# Altium PCB opamp.PcbDoc
Units mil, origin at the board's own origin, x right, y up, seen from the top; angles counter-clockwise.
Board outline 3000 x 2300 mil, 2 copper layers (Top Layer, Bottom Layer); 13 components, 7 nets, 36 pads, 0 vias.
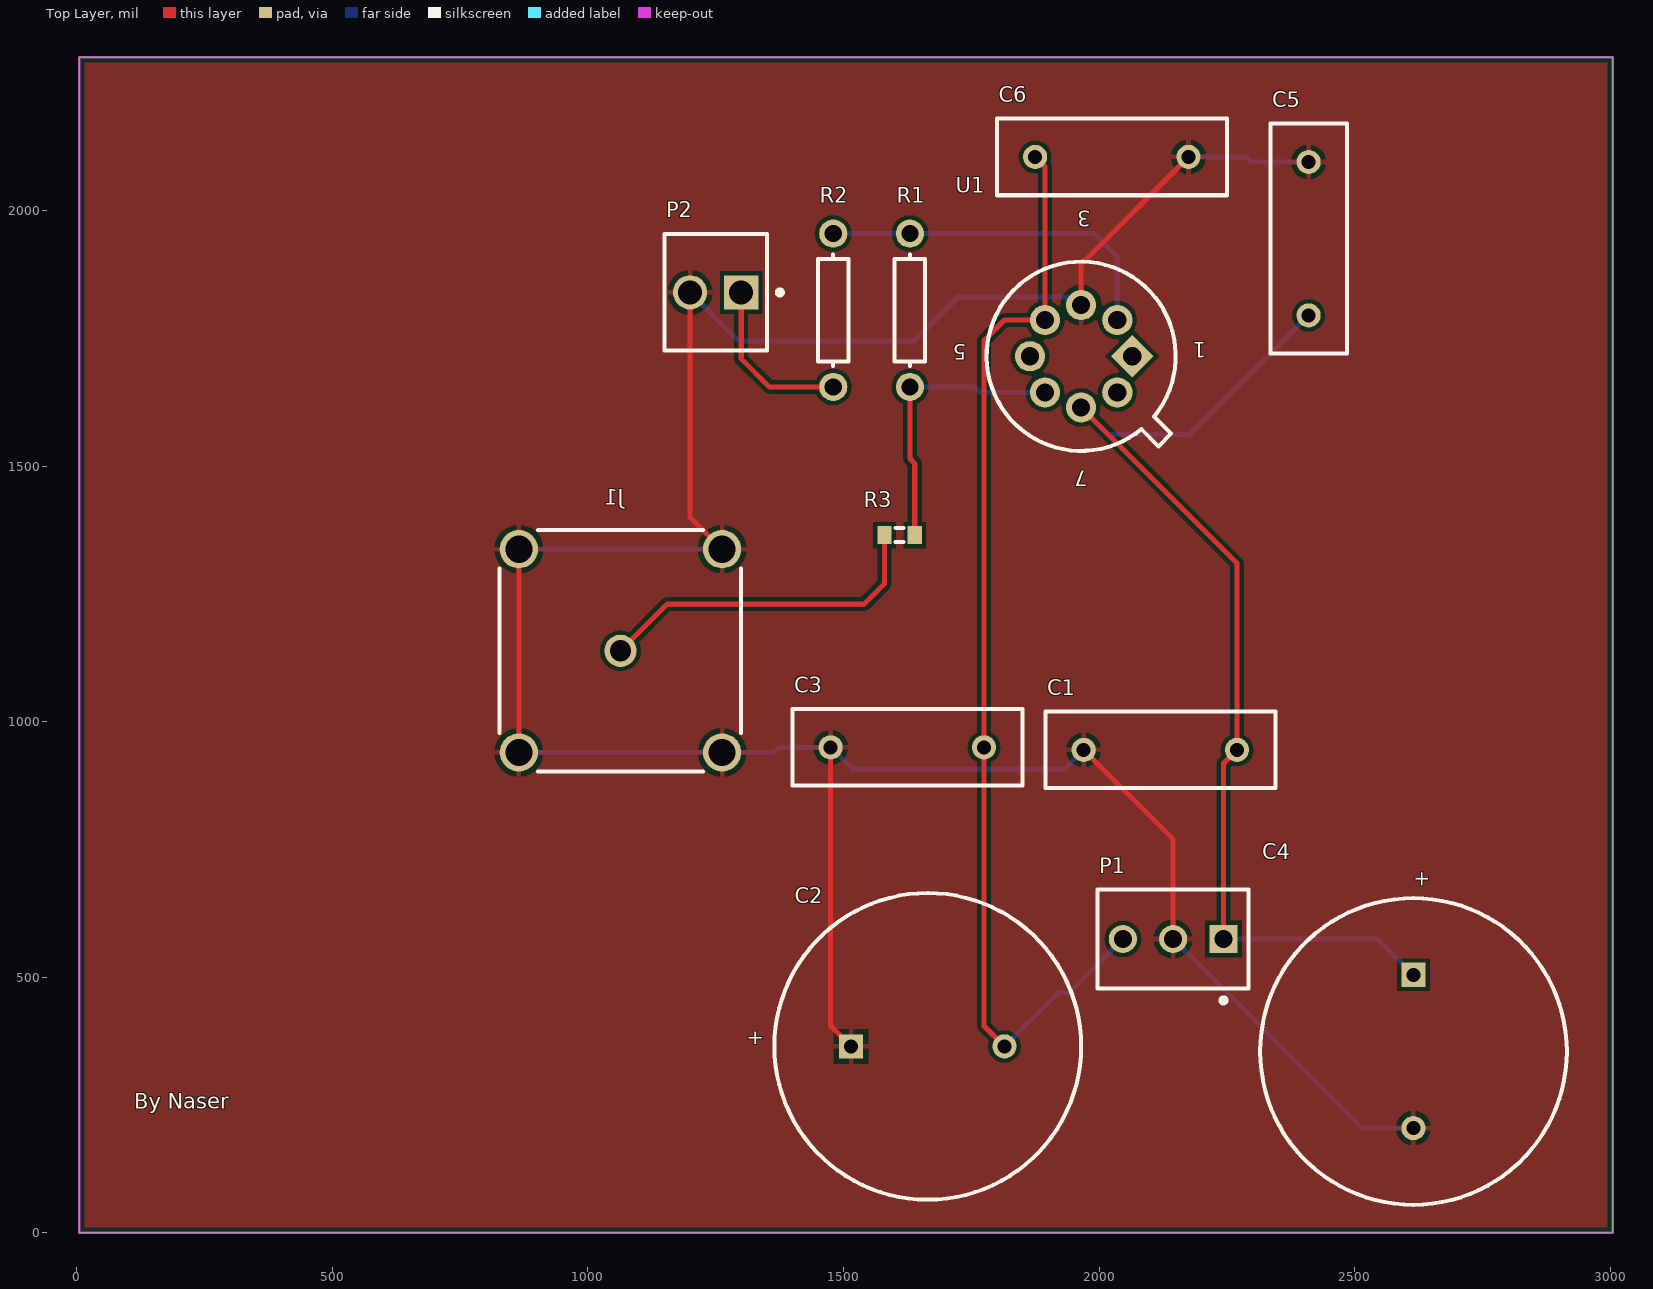
[diagram p0: Top Layer view]
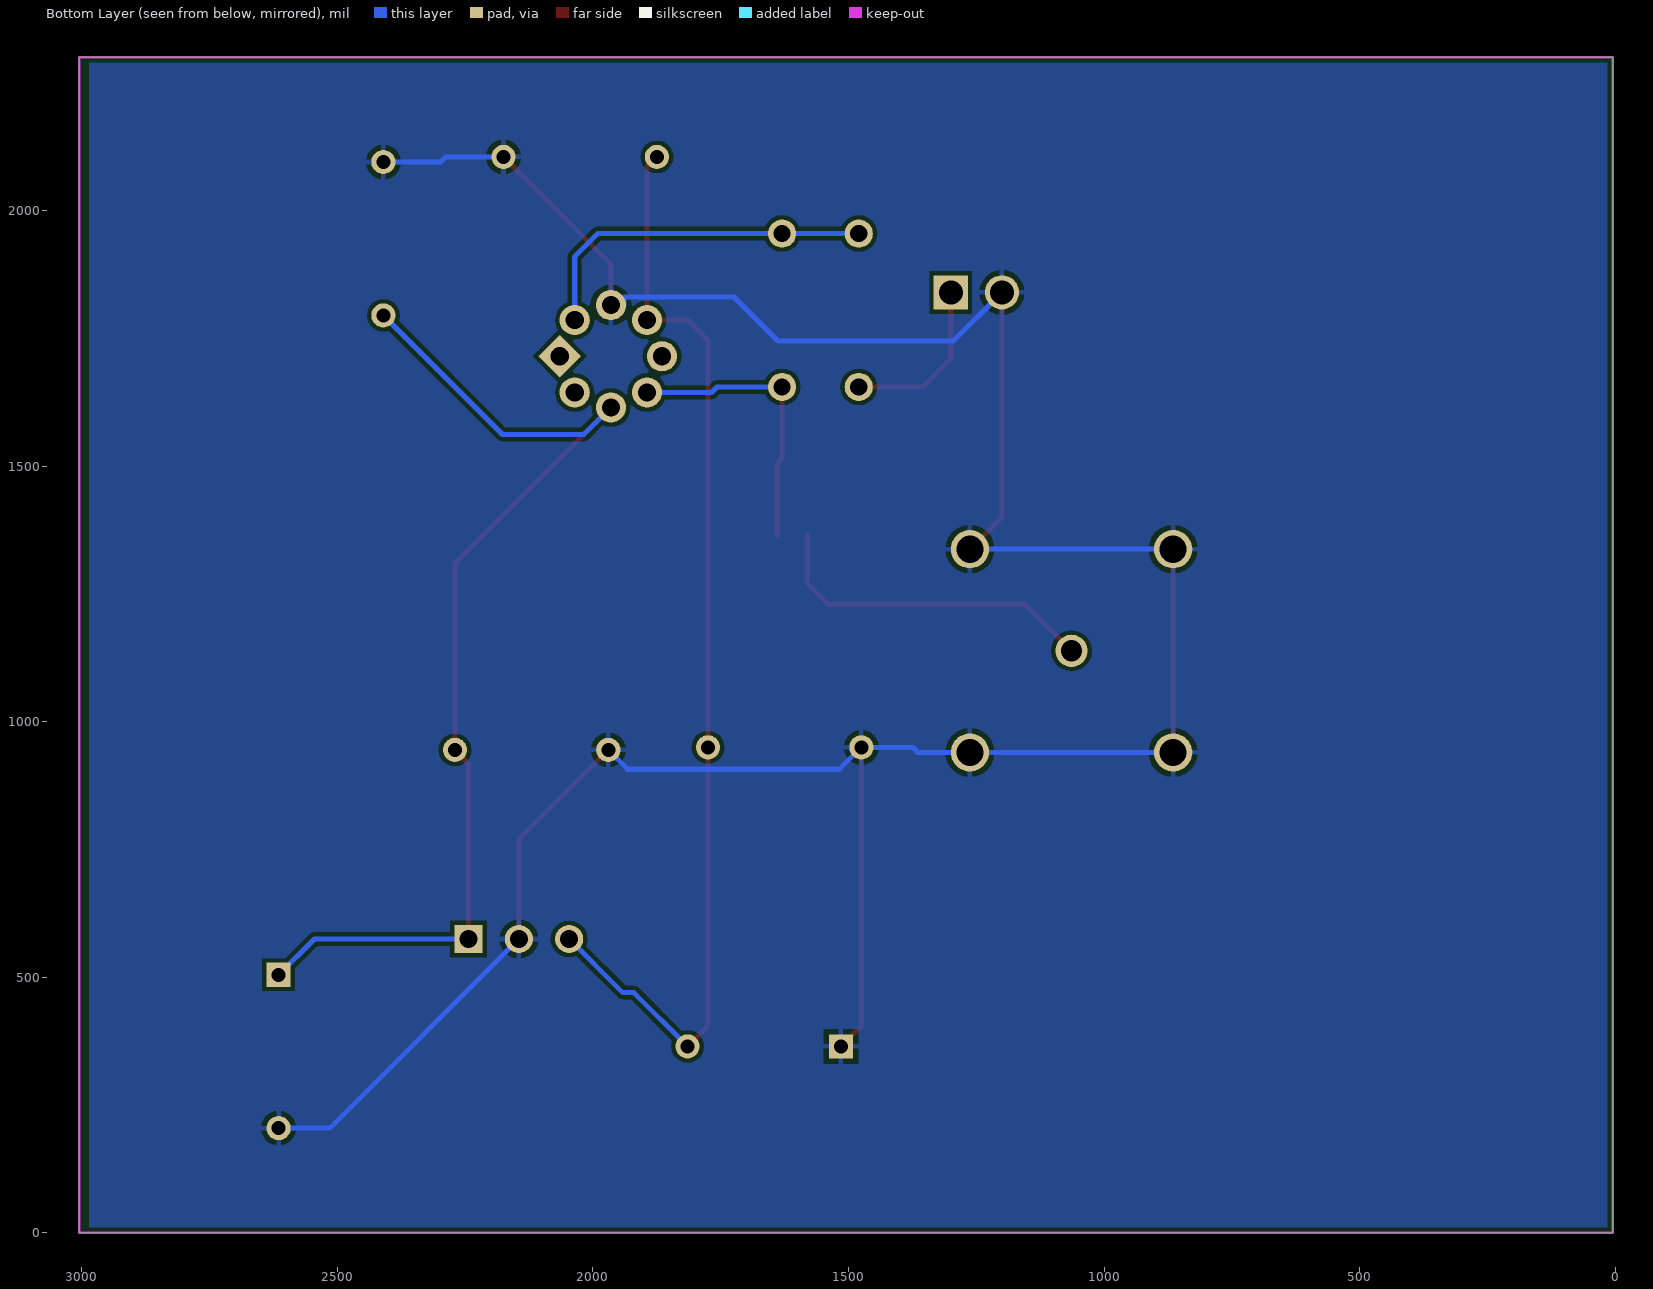
[diagram p1: Bottom Layer view, seen from below]

## Layer stack, top to bottom
Top Solder: solder mask 0.4, Solder Resist, Dk 3.5
Top Layer: signal copper 1.4
Dielectric 1: dielectric 12.6, FR-4, Dk 4.8
Bottom Layer: signal copper 1.4
Bottom Solder: solder mask 0.4, Solder Resist, Dk 3.5

## Board outline
5,0 3005,0 3005,2300 5,2300

## Design rules (kind name [scope] priority, off if disabled: settings)
Clearance [All] p1: gap=8 ignorepadtopadclearanceinfootprint=FALSE
MinimumSolderMaskSliver [All] p1: minsoldermaskwidth=1
PolygonConnect [All] p1: connectstyle=Relief reliefconductorwidth=10 reliefentries=4 polygonreliefangle="90 Angle" airgapwidth=10
RoutingVias [All] p1: holewidth=28 width=50 viastyle="Through Hole" minholewidth=28 minwidth=50 maxholewidth=28 maxwidth=50
SilkToSilkClearance [All] p1: silktosilkclearance=1
SilkToSolderMaskClearance [IsPad] p1: minsilkscreentomaskgap=1 clearancetoexposedcopper=TRUE
SolderMaskExpansion [All] p1: expansion=4 istentingtop=FALSE
Width [All] p1: maxlimit=10 minlimit=10 preferedwidth=10
27 further rules are at their usual default settings.

## Classes and differential pairs
component class power: C1 C2 C3 C4 P1
component class opamp: C5 C6 J1 P2 R1 R2 R3

## Components (designator, comment, footprint, x,y, rotation, side; value= is the part's Value field where it differs from the comment)
C1 "Cap" RAD-0.3 2120,945 r0 top value=100nF
C2 "Cap Pol1" RB7.6-15 1665,365 r180 top value=100uF
C3 "Cap" RAD-0.3 1625,950 r0 top value=100nF
C4 "Cap Pol1" RB7.6-15 2615,355 r90 top value=100uF
C5 "Cap" RAD-0.3 2410,1945 r270 top value=100nF
C6 "Cap" RAD-0.3 2025,2105 r180 top value=100nF
J1 "51K204-400A5" ROS-51K204-400A5_V 1063.82,1138.82 r270 top
P1 "171825-3" TECO-171825-3_V 2145,575 r180 top
P2 "22-27-2021" MOLX-22-27-2021_V 1250,1840 r180 top
R1 "Res1" AXIAL-0.3 1630,1805 r270 top value=10K
R2 "Res1" AXIAL-0.3 1480,1805 r90 top value=1K
R3 "Res3" J1-0603 1610,1365 r180 top value=50
U1 "Op Amp" H-08A 1965,1715 r180 top

## Footprints (in the part's own frame and the unit in brackets; to place one, negate y for a bottom-side part, rotate by r counter-clockwise, add the part's x,y. Pads: shape width x height; smd on the part's side, far side on the other; paste and mask are expansions set on the pad)
AXIAL-0.3 [mm] "Axial Device, Thru-Hole; 2 Leads; 0.3 in Pin Spacing"
  round 1.4 hole 0.85: 1(-3.81,0) 2(3.81,0)
  silkscreen extent -2.77,-0.76 2.77,0.76
H-08A [mm] "Can; 8 Leads; Pin Circle Dia. 5.08 mm; Lead Dia. 0.53 mm (max)"
  rect 1.5x1.5 hole 0.9 rot 45: 1(-2.54,0)
  round 1.5 hole 0.9: 2(-1.796,-1.796) 3(0,-2.54) 4(1.796,-1.796) 5(2.54,0) 6(1.796,1.796) 7(0,2.54) 8(-1.796,1.796)
  silkscreen extent -4.7,-4.7 4.7,4.7
J1-0603 [mm] "Chip Resistor, Body 1.6x0.8mm, IPC High Density"
  rect 0.7x0.9 smd: 1(-0.75,0) 2(0.75,0)
  silkscreen extent -0.2,-0.35 0.2,0.35, body extent -0.85,-0.48 0.85,0.48, height 0.9
MOLX-22-27-2021_V [mm] "Header, 2-Leads, Body 5.8x5.08mm"
  rect 1.7x1.7 hole 1.19: 1(-1.27,0)
  round 1.7 hole 1.19: 2(1.27,0)
  silkscreen extent -3.32,-2.9 2.54,2.9, body extent -2.54,-2.9 2.54,2.9, height 11.72
RAD-0.3 [mm] "Radial Cap, Thru-Hole; 2 Leads; 0.3 in Pin Spacing"
  round 1.2 hole 0.7: 1(-3.81,0) 2(3.81,0)
  silkscreen extent -5.71,-1.91 5.71,1.91
RB7.6-15 [mm] "Polarized Capacitor (Radial); 2 Leads"
  rect 1.2x1.2 hole 0.7: 1(3.81,0)
  round 1.2 hole 0.7: 2(-3.81,0)
  silkscreen extent -7.62,-7.62 7.62,7.62
ROS-51K204-400A5_V [mm] "BNC 50R Right Angle Jack, 12.5x32.6x14.5mm, Rosenberger Recommended"
  round 1.6 hole 1.05: 1(0,0)
  round 1.9 hole 1.35: MH(-5.05,5.05) MH(-5.05,-5.05) MH(5.05,5.05) MH(5.05,-5.05)
  silkscreen extent -6,-6 6,6, body extent -6.25,-26.6 6.25,6, height 15.25
TECO-171825-3_V [mm] "Connector, 3-Leads, Body 4.9x7.5mm, Pitch 2.5mm"
  rect 1.4x1.4 hole 0.9: 1(-2.5,0)
  round 1.4 hole 0.9: 2(0,0) 3(2.5,0)
  silkscreen extent -3.75,-2.45 3.75,3.17, body extent -3.75,-2.4 3.75,2.5, height 10.4

## Part data
C1 C3 C5 C6: "Capacitor", LatestRevisionDate=17-Jul-2002, LatestRevisionNote="Re-released for DXP Platform.", PackageDescription="Radial Cap, Thru-Hole; 2 Leads; 0.3 in Pin Spacing", PackageReference=RAD-0.3, Published=8-Jun-2000, Publisher="Altium Limited"
C2 C4: "Polarized Capacitor (Radial)", LatestRevisionDate=17-Jul-2002, LatestRevisionNote="Re-released for DXP Platform.", PackageDescription="Polarized Capacitor (Radial); 2 Leads", PackageReference=RB7.6-15, Published=8-Jun-2000, Publisher="Altium Limited"
J1: library part CMP-0753-00004-1, "BNC 50R Right Angle Jack, Panel Feedthrough, Up to 10 GHz, -55 to 155 degC", Manufacturer=Rosenberger, ComponentLink1Description="Manufacturer URL", ComponentLink1URL=http://www.rosenberger.de, ComponentLink2Description=Datasheet, ComponentLink2URL=http://rosenberger.de/ok/images/documents/db/51K204-400A5.pdf, ComponentLink3Description="Package Specification", ComponentLink3URL=http://rosenberger.de/ok/images/documents/db/51K204-400A5.pdf, ComponentLink4Description="Series Overview / Design Note", ComponentLink4URL=http://rosenberger.de/ok/images/documents/spez/51.pdf, ComponentLink5Description="Webshop / RFQ", ComponentLink5URL=http://www.rosenberger.com/en/contact/sales/, DatasheetVersion=d00, Design Note="Footprint in library is a generic example - only application specific footprint delivers High Performance", Mounting Technology="Through Hole", PackageDescription="50R BNC Right Angle Jack, 12.5 x 32.6 x 14.5 mm", PackageReference=51K204-400A5, PackageVersion=d00, PartNumber=51K204-400A5
P1: library part CMP-2000-07494-1, "Male Header, Pitch 2.5 mm, 1 x 3 Position, Height 10.4 mm, Tail Length 3.6 mm,  / -20 to 95 degC / , RoHS, Bulk", Colour=Natural, Contact Resistance=20mOhm, Flammability Rating=UL94V-0, Manufacturer="TE Connectivity", Max Current Rating=3.5A, Max Operating Temperature=95degC, Max Voltage Rating (AC)=250V, Max Voltage Rating (DC)=350.25kV, Min Operating Temperature=-20degC, Package Description="Male Header, Pitch 2.5 mm, 1 x 3 Position, Height 10.4 mm, Tail Length 3.6 mm", Package Quantity=1000, Voltage Rating=350V, Approvals=UL, Backwall/Post Interruptions=No(Without), Connector Type=Header, Contact Gender=Male, Contact Material=Brass, Contact Mating Length=0.295inch, Contact Plating=Tin, Contact Retention=No(Without), Contact Shape=Square, Datasheet URL=http://www.te.com/commerce/DocumentDelivery/DDEController?Action=showdoc&DocId=Customer+Drawing%7F171825%7FY3%7Fpdf%7FEnglish%7FENG_CD_171825_Y3.pdf%7F171825-3, Datasheet Version="Rev. Y3, 12/2016", Depth=4.9mm, Height=0.409inch, Housing Colour=Natural, Housing Material=Nylon, Length=7.5mm, Manufacturer URL=http://www.te.com/, Mating Alignment=Yes(With), Mating Post Length=7.5mm, Mating Retention=Yes(With), Mount=ThroughHole, Mounting Technology=ThroughHole, Number Of Contacts=3, Number of Positions=3, Number Of Rows=1, Orientation=Straight, Package Reference=171825-3, Packaging=Bag, Panel Mount Retention=No(Without), PCB Mount Alignment=No(Without), PCB Mount Retention=Without, PCB Mounting Orientation=Vertical, PCB Thickness=0.063inch, Pitch=2.5mm, Plating Thickness=0.8um, REACH SVHC=NoSVHC, RoHSCompliant=True, Strain Relief=No(Without), Tail Length=0.142inch, Termination=Solder
P2: library part CMP-2000-05537-1, "Male Header, Pitch 2.54 mm, 1 x 2 Position, Height 11.7 mm, Tail Length 3.56 mm, 0 to 75 degC, RoHS, Bulk", Current - Max=4A, Manufacturer=Molex, Operating temperature=0°Cto+75°C, Package Description="2-Leads Header, Body 5.08 x 5.8 mm, Pitch 2.54 mm", Package Version="Rev. BC, 02/2012", PartNumber=0022272021, Voltage - Max=250V, Contact Material=Tinplatedbrass, Current Rating=4A, Datasheet URL=http://www.molex.com/pdm_docs/sd/022272021_sd.pdf, Datasheet Version="Rev. F, 06/2009", Housing Material=Nylon(UL94V-0), Manufacturer URL=http://www.molex.com/, Mounting Technology=ThroughHole, No. of Positions=2, No. of Rows=1, Orientation=Vertical, Package Reference=22-27-2021, Pitch=2.54mm, Voltage Rating=250V
R1 R2 R3: "Resistor", Published=8-Jun-2000, Publisher="Altium Limited"
  R1 R2: LatestRevisionDate=17-Jul-2002, LatestRevisionNote="Re-released for DXP Platform.", PackageDescription="Axial Device, Thru-Hole; 2 Leads; 0.3 in Pin Spacing", PackageReference=AXIAL-0.3
  R3: LatestRevisionDate=29-May-2009, LatestRevisionNote="IPC-7351 Footprint Added.", PackageDescription="Chip Resistor", PackageReference=J1-0603
U1: "FET Operational Amplifier", ComponentLink1Description="Manufacturer Link", ComponentLink1URL=http://www.analog.com/, DatasheetVersion="REV. B", LatestRevisionDate=17-Jul-2002, LatestRevisionNote="Re-released for DXP Platform.", PackageDescription="Can; 8 Leads; Pin Circle Dia. 5.08 mm; Lead Dia. 0.53 mm (max)", PackageReference=H-08A, PackageVersion=1990, Published=8-Jun-2000, Publisher="Altium Limited"

## Nets (pads, with @x,y where several pads share a name; then routed paths per layer and width w, separated by ;. In a path a pad name is that pad's centre, name@x,y a point inside that pad or via, vN(x,y) a via of type N, cw(c..) or ccw(c..) an arc to the next point about the centre after c; other vN are vias at no path point)
+12: C1.2 C4.1 C5.2 P1.1 U1.7 | length 2141.4
  Top Layer w10: U1.7 2270,1310 C1.2 2243.43,918.43 P1.1
  Bottom Layer w10: U1.7 2018,1562 2177,1562 C5.2 ; P1.1 2545,575 C4.1
-12: C2.2 C3.2 C6.2 P1.3 U1.4 | length 2179
  Top Layer w10: C2.2 1775,405 C3.2 1775,1745.71 1815,1785.71 U1.4 1894.29,2085.71 C6.2
  Bottom Layer w10: C2.2 1920,470 1941.57,470 P1.3
GND: C1.1 C2.1 C3.1 C4.2 C5.1 C6.1 J1.MH P1.2 P2.2 U1.3 | length 5605.7
  Top Layer w10: J1.MH@865,940 J1.MH@865,1337.64 ; P2.2 1200,1400.28 J1.MH@1262.64,1337.64 ; C3.1 1475,405 C2.1 ; U1.3 1965,1895 C6.1 ; C1.1 2145,770 P1.2
  Bottom Layer w10: J1.MH@865,940 1262.64,940 1364,940 1374,950 C3.1 1518,907 1932,907 C1.1 ; J1.MH@865,1337.64 J1.MH@1262.64,1337.64 ; P2.2 1295,1745 1638,1745 1724,1831 1939,1831 1939,1815 U1.3 ; P1.2 2515,205 C4.2 ; C6.1 2288,2105 2298,2095 C5.1
Input: P2.1 R2.1 | length 332.8
  Top Layer w10: P2.1 1300,1710 1355,1655 R2.1
NetJ1_1: J1.1 R3.2 | length 666
  Top Layer w10: J1.1 1154.95,1229.94 1540.42,1229.94 1580.47,1270 R3.2
NetR1_1: R1.1 R2.2 U1.2 | length 698.6
  Bottom Layer w10: R2.2 R1.1 1990.71,1955 2035.71,1910 U1.2
NetR1_2: R1.2 R3.1 U1.6 | length 562.7
  Top Layer w10: R1.2 1630,1515 1639.53,1505.47 R3.1
  Bottom Layer w10: R1.2 1757.29,1655 1768,1644.29 U1.6
pads on no net: U1.1 U1.5 U1.8

## Polygon pours and split planes (outlines as drawn)
GND on Bottom Layer "GND_L02_P001" (solid, remove dead copper, pour order 1): 15,2300 2995,2300 2985,2290 2985,10 0,10
GND on Top Layer "GND_L01_P000" (solid, remove dead copper, pour order 0): 5,2300 3005,2300 3005,0 -5,0

## Keep-outs
Keep-Out Layer:
  the board outline again, w5

## Silkscreen, mask and mechanical layers (free items; w line width, h text height)
Top Overlay:
  text "By Naser" at 113,243 h30

## Text inside footprints (layer, text, board x,y; h text height)
C2: Top Overlay "+" at 1344.85,394.01 h30 r180
C4: Top Overlay "+" at 2644.01,675.15 h30 r90
U1: Top Overlay "1" at 2209.88,1742.4 h30 r180; Top Overlay "3" at 1983.47,1999.25 h30 r180; Top Overlay "5" at 1740.12,1738.19 h30 r180; Top Overlay "7" at 1978.07,1490.59 h30 r180